# Altium PCB PCB1.PcbDoc
Units mm, origin at the board's own origin, x right, y up, seen from the top; angles counter-clockwise.
Board outline 46.99 x 49 mm, 2 copper layers (Top Layer, Bottom Layer), stack 0.578 mm thick; 50 components, 44 nets, 156 pads, 56 vias.
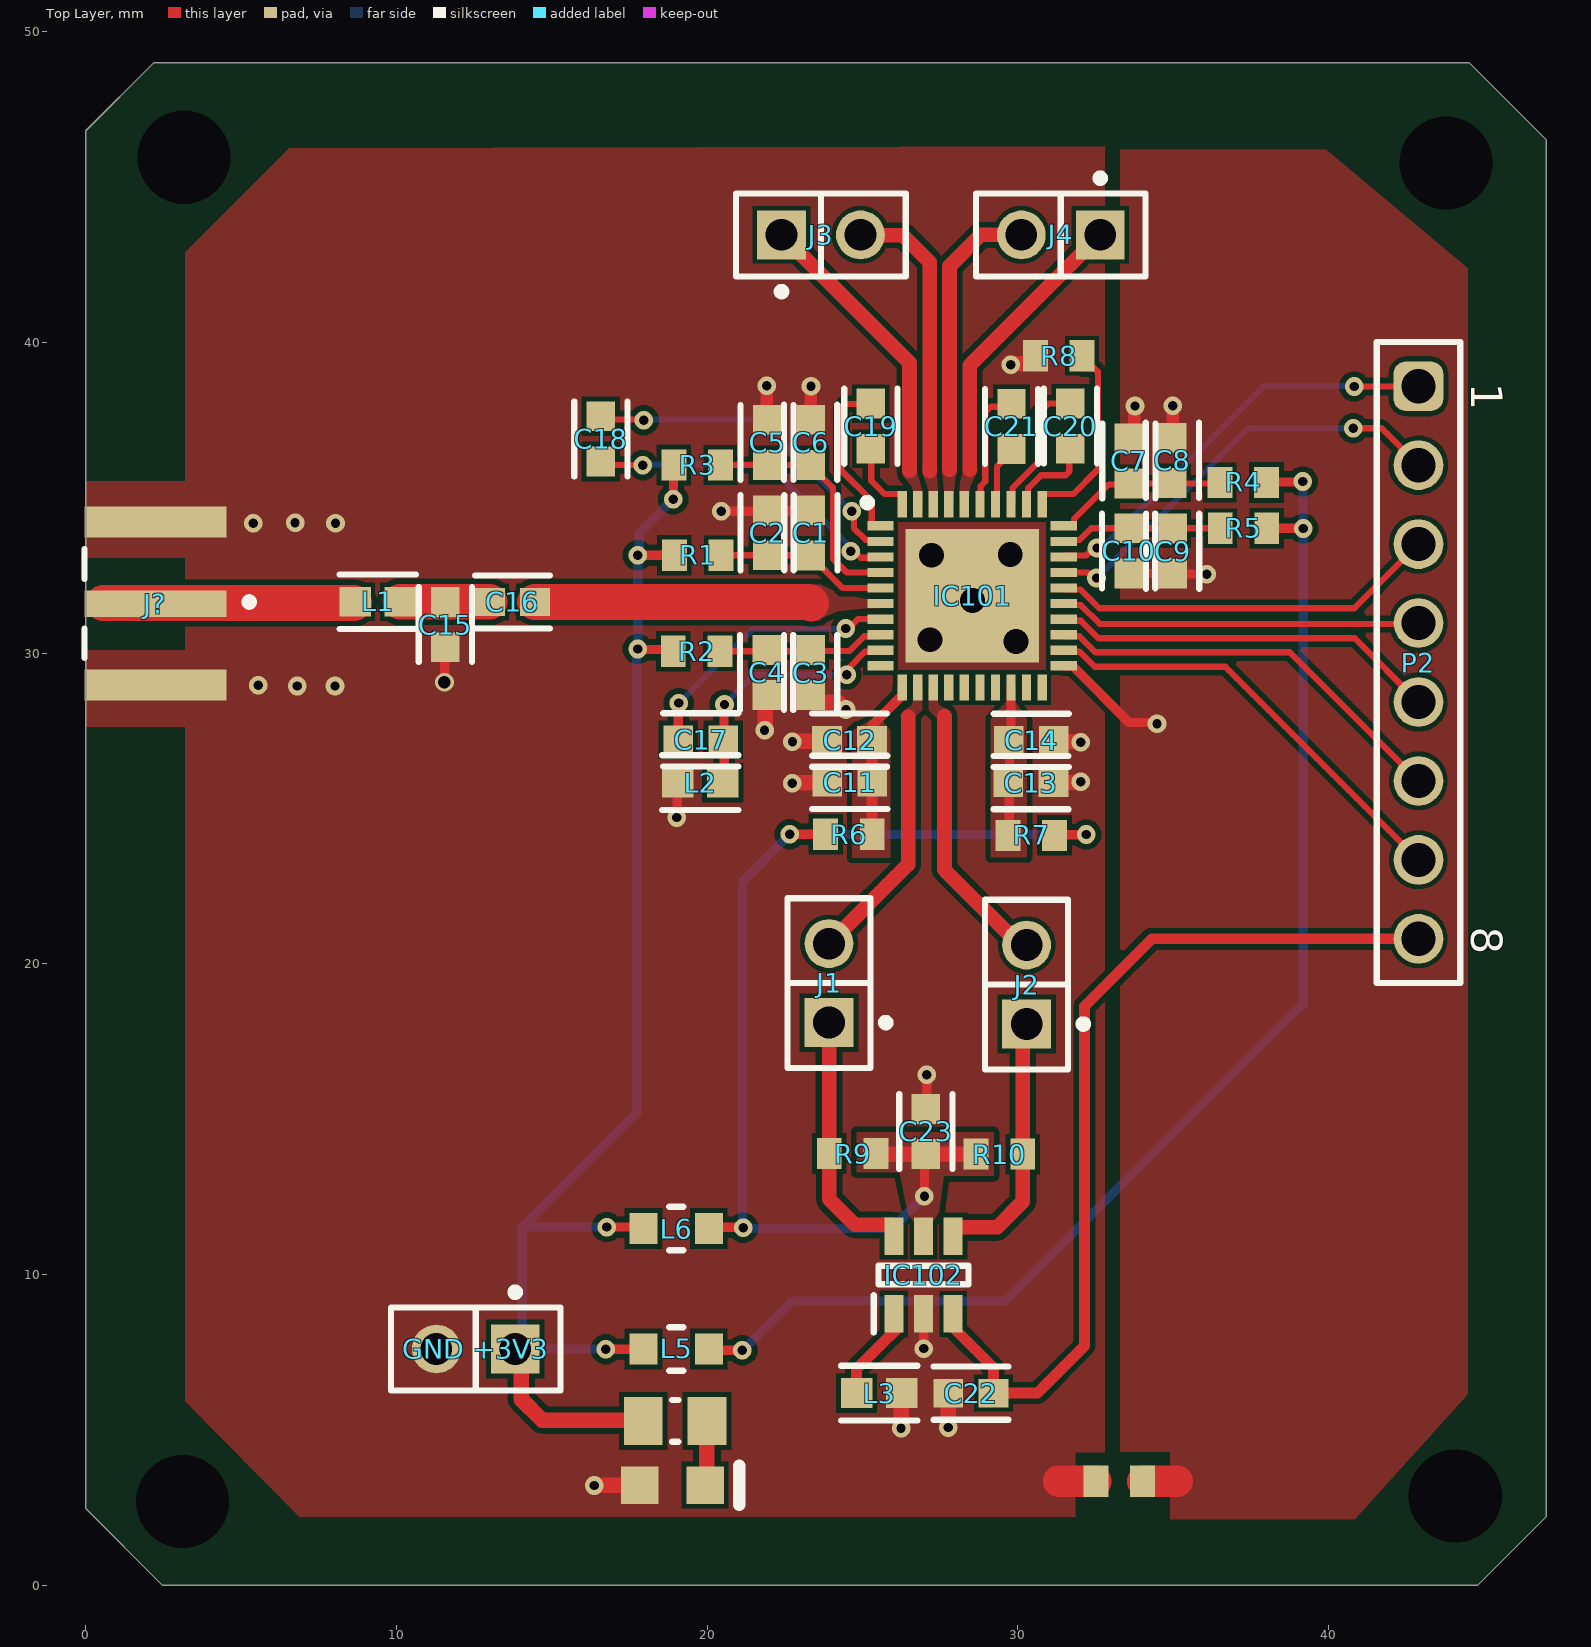
[diagram p0: Top Layer view]
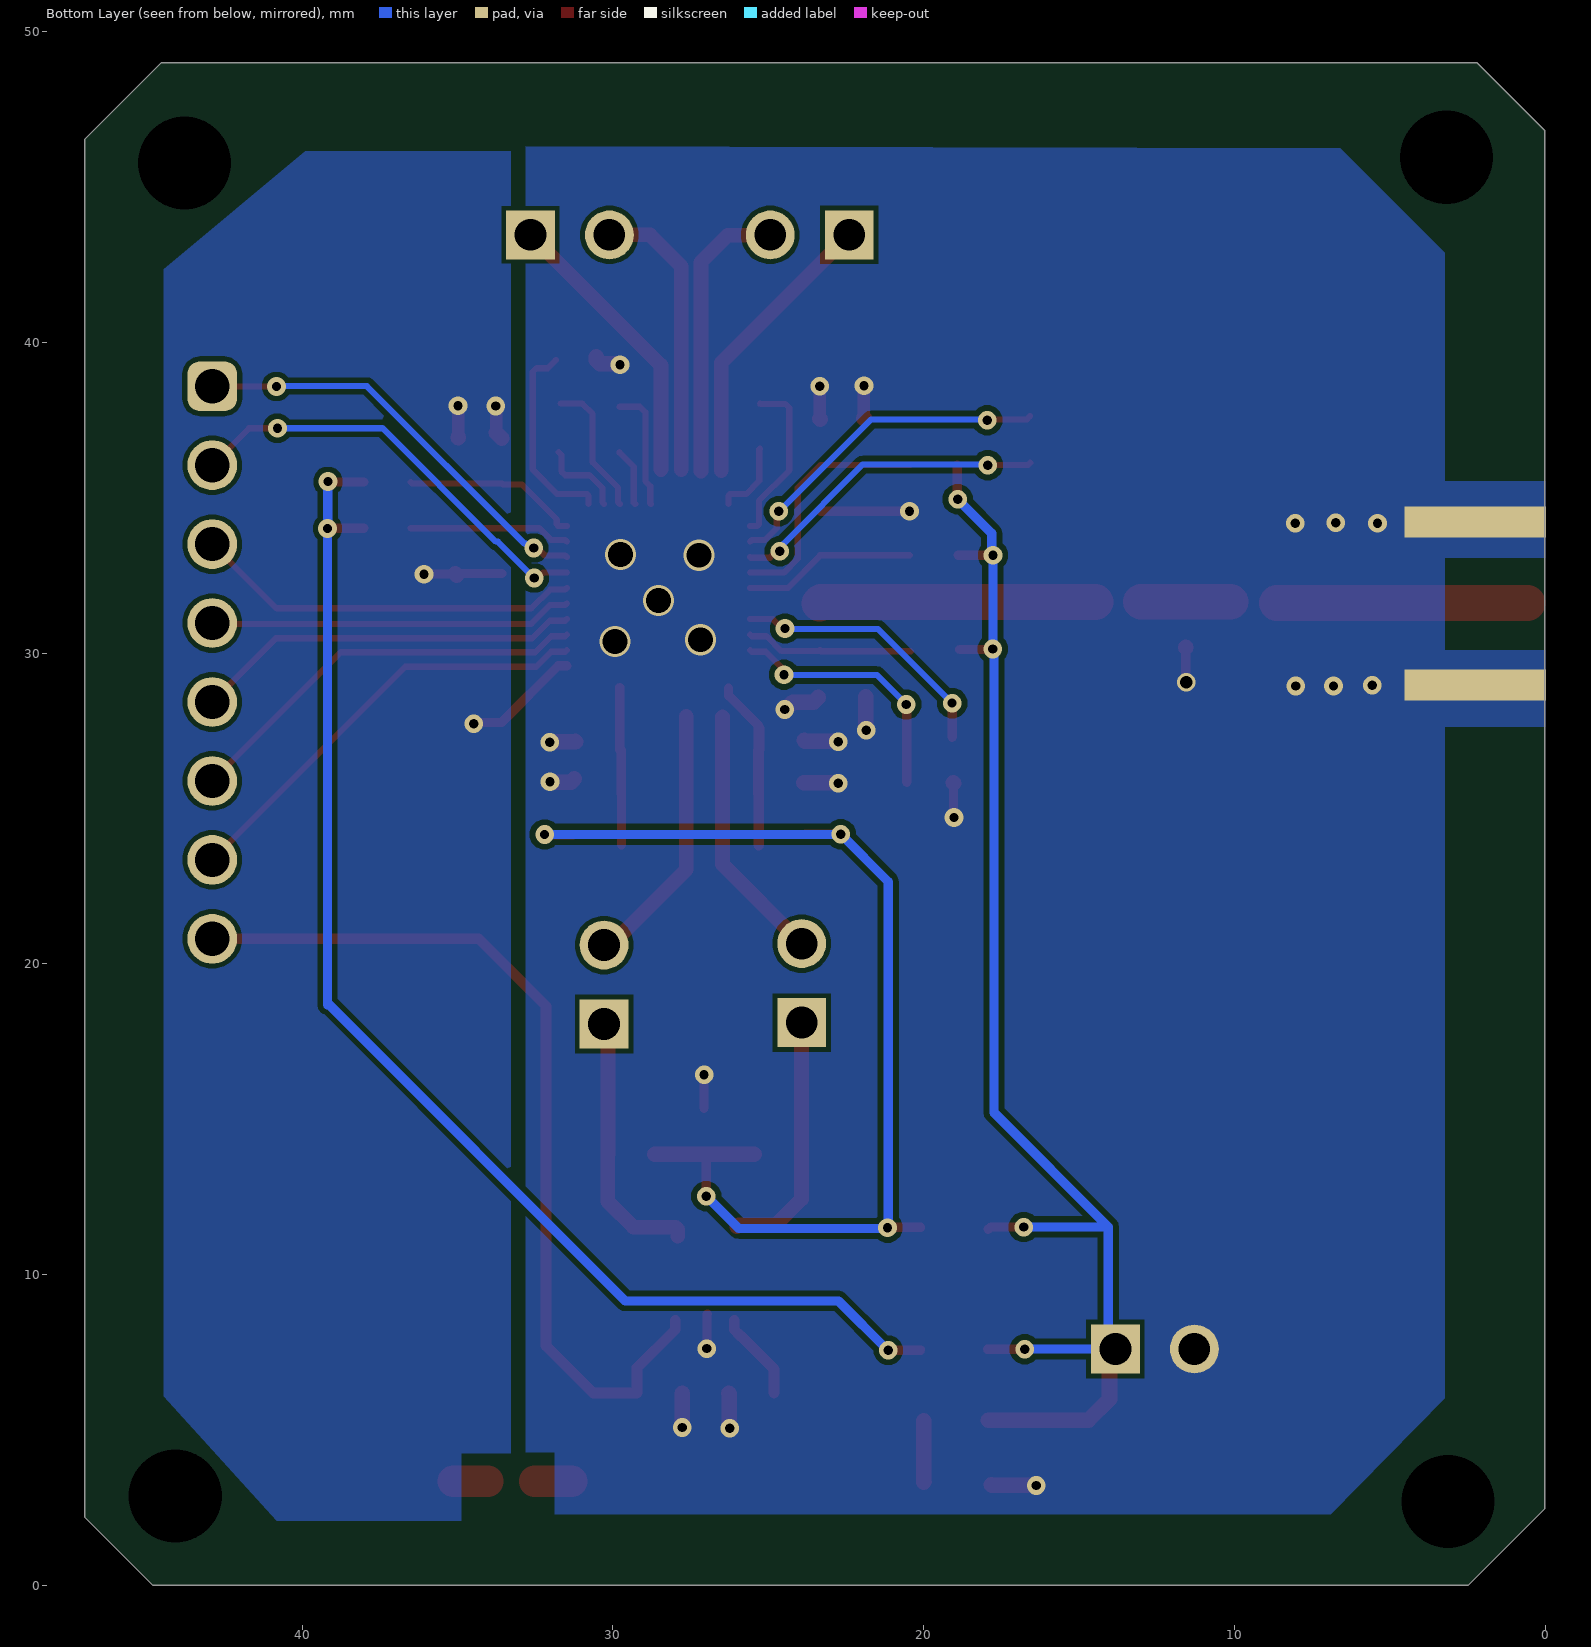
[diagram p1: Bottom Layer view, seen from below]
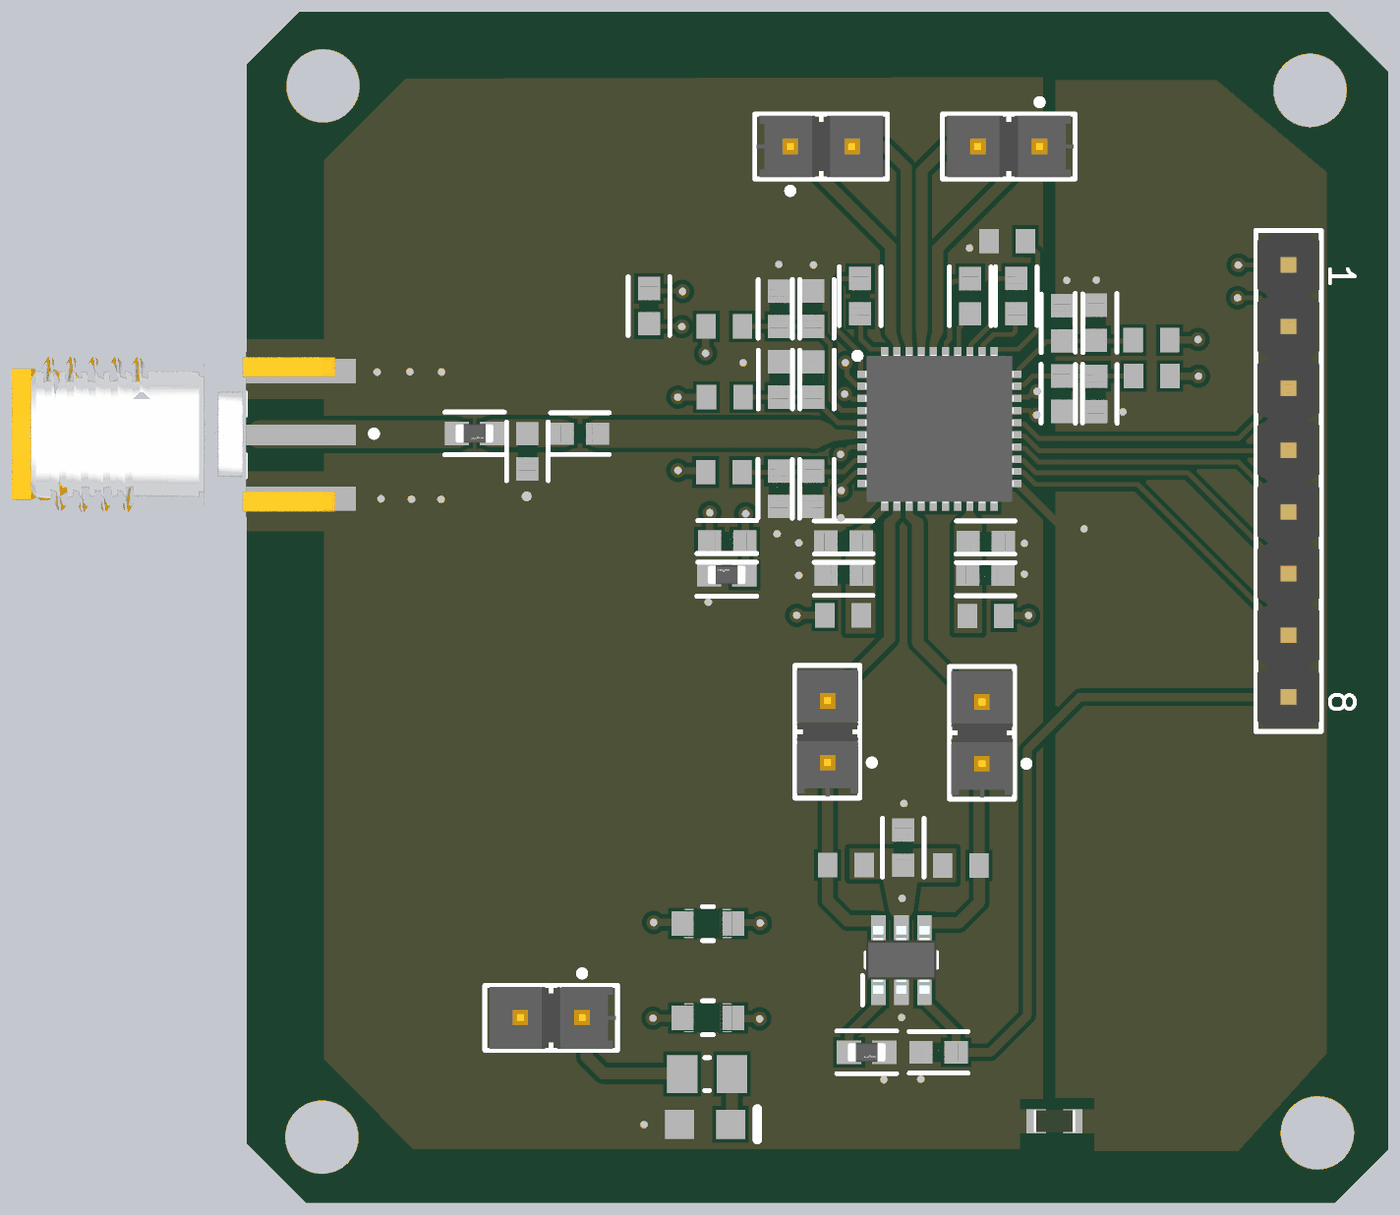
[diagram p2: 3D render of the assembled board from above, using the file's embedded part models]

## Layer stack, top to bottom
Board Layer Stack Top Solder: solder mask 0.0254, SM-001, Dk 4
Top Layer: signal copper 0.035
Dielectric 1: core 0.508, Core-043, Dk 3.38
Bottom Layer: signal copper 0.035
Board Layer Stack Bottom Solder: solder mask 0.0254, SM-001, Dk 4

## Board outline
0.009,2.471 0.009,46.806 2.203,49 44.523,49 47,46.523 47,2.202 44.798,0 2.48,0

## Design rules (kind name [scope] priority, off if disabled: settings)
Clearance [All] p1: gap=0.18 ignorepadtopadclearanceinfootprint=FALSE except(0.15: Arc-Arc Arc-Track Arc-SMDPad Arc-THPad Arc-Text Track-Track Track-SMDPad Track-THPad Track-Text SMDPad-SMDPad SMDPad-THPad SMDPad-Fill SMDPad-Poly SMDPad-Region SMDPad-Text THPad-THPad THPad-Fill THPad-Poly THPad-Region THPad-Text)
DiffPairsRouting DiffPairsRouting_1 [All] p1: maxlimit=0.149 minlimit=0.149 mostfreqgap=0.149 toplayer_minwidth=0.474 toplayer_maxwidth=0.474 toplayer_prefwidth=0.474 bottomlayer_minwidth=0.474 bottomlayer_maxwidth=0.474 bottomlayer_prefwidth=0.474 impedanceprofiledriven=TRUE impedanceprofileid={EFA40B8C-70B7-4446-A53F-03A1FA4931DC} impedanceprofilevalue=100.000000 maxuncoupledlength=12.7
HoleSize [All] p1: absolutevalues=TRUE maxlimit=3 minlimit=0.025 maxpercent=80.000 minpercent=20.000
MinimumSolderMaskSliver [All] p1: minsoldermaskwidth=0.12
PolygonConnect [All] p1: connectstyle=Direct reliefconductorwidth=0.254 reliefentries=4 polygonreliefangle="90 Angle" airgapwidth=0.254
RoutingVias [All] p1: holewidth=0.4 width=0.6 viastyle="Through Hole" minholewidth=0.3 minwidth=0.45 maxholewidth=0.4 maxwidth=0.6
SilkToSilkClearance [All] p1: silktosilkclearance=0.12
SilkToSolderMaskClearance [IsPad] p1: minsilkscreentomaskgap=0 clearancetoexposedcopper=TRUE
SolderMaskExpansion [All] p1: expansion=0.1 istentingtop=TRUE
Width [All] p1: maxlimit=10 minlimit=0.2 preferedwidth=0.2 minimp=50.000000 maximp=50.000000 favimp=50.000000
25 further rules are at their usual default settings.

## Classes and differential pairs
component class CMX994AQ4: C1 C2 C3 C4 C5 C6 C7 C8 C9 C10 C11 C12 C13 C14 C15 C16 C17 C18 C19 C20 C21 C22 C23 "GND +3V3" IC101 IC102 J1 J2 J3 J4 J? L1 L2 L3 L5 L6 P2 R1 R2 R3 R4 R5 R6 R7 R8 R9 R10
differential pair LO: +LO_P -LO_N
differential pair OUT: +OUT_P -OUT_N
differential pair RXQ: +RXQ_P -RXQ_N
differential pair RXI: +RXI_P -RXI_N

## Components (designator, comment, footprint, x,y, rotation, side; value= is the part's Value field where it differs from the comment)
C1 "CL10B392KB8NNND" FP-CL10-IPC_B#1 23.342,33.87 r90 top value=3.9nF
C2 "CL10B392KB8NNND" FP-CL10-IPC_B#1 21.935,33.871 r90 top value=3.9nF
C3 "CL10B392KB8NNND" FP-CL10-IPC_B#2 23.336,29.372 r270 top value=3.9nF
C4 "CL10B392KB8NNND" FP-CL10-IPC_B#1 21.922,29.376 r270 top value=3.9nF
C5 "CL10B392KB8NNND" FP-CL10-IPC_B#1 21.931,36.778 r90 top value=3.9nF
C6 "CL10B392KB8NNND" FP-CL10-IPC_B#1 23.337,36.783 r90 top value=3.9nF
C7 "CL10B392KB8NNND" FP-CL10-IPC_B#1 33.573,36.182 r90 top value=3.9nF
C8 "CL10B392KB8NNND" FP-CL10-IPC_B#1 34.976,36.204 r90 top value=3.9nF
C9 "CL10B392KB8NNND" FP-CL10-IPC_B#1 34.983,33.279 r270 top value=3.9nF
C10 "CL10B392KB8NNND" FP-CL10-IPC_B#1 33.567,33.289 r270 top value=3.9nF
C11 "CL10B392KB8NNND" FP-CL10-IPC_B#1 24.593,25.842 r180 top value=3.9nF
C12 "CL10B392KB8NNND" FP-CL10-IPC_B#1 24.586,27.201 r180 top value=3.9nF
C13 "CL10B392KB8NNND" FP-CL10-IPC_B#1 30.424,25.829 r0 top value=3.9nF
C14 "CL10B392KB8NNND" FP-CL10-IPC_B#1 30.434,27.194 r0 top value=3.9nF
C15 "CL10B392KB8NNND" FP-CL10-IPC_B#1 11.58,30.917 r270 top value=3.9nF
C16 "CL10B392KB8NNND" FP-CL10-IPC_B#1 13.741,31.645 r0 top value=3.9nF
C17 "CL10B392KB8NNND" FP-CL10-IPC_B#1 19.799,27.209 r0 top value=3.9nF
C18 "CL10B392KB8NNND" FP-CL10-IPC_B#1 16.582,36.891 r270 top value=3.9nF
C19 "CL10B392KB8NNND" FP-CL10-IPC_B#1 25.271,37.3 r90 top value=3.9nF
C20 "CL10B392KB8NNND" FP-CL10-IPC_B#1 31.691,37.303 r270 top value=3.9nF
C21 "CL10B392KB8NNND" FP-CL10-IPC_B#1 29.798,37.295 r270 top value=3.9nF
C22 "CL10B392KB8NNND" FP-CL10-IPC_B#1 28.493,6.188 r0 top value=3.9nF
C23 "CL10B392KB8NNND" FP-CL10-IPC_B#1 27.044,14.606 r90 top value=3.9nF
D? "HSMG-C170" AVAG-HSMX-C170_V 18.889,3.225 r0 top
"GND +3V3" "TSW-102-14-G-S" FP-TSW-102-14-G-S-MFG 12.56,7.607 r180 top (schematic designator J5)
IC101 "CMX994AQ4" QFN50P600X600X100-41N-D 28.533,31.843 r0 top
IC102 "MAX2606EUT+T" SOT95P280X145-6N 26.966,9.988 r90 top
J1 "TSW-102-14-G-S" FP-TSW-102-14-G-S-MFG 23.926,19.38 r90 top
J2 "TSW-102-14-G-S" FP-TSW-102-14-G-S-MFG 30.285,19.333 r90 top
J3 "TSW-102-14-G-S" FP-TSW-102-14-G-S-MFG 23.667,43.457 r0 top
J4 "TSW-102-14-G-S" FP-TSW-102-14-G-S-MFG 31.384,43.457 r180 top
J? "EMPCB.SMAFSTJ.B.HT" FP-EMPCB_SMAFSTJ_B_HT-MFG -4.777,31.593 r90 top
L1 "LQM18NNR22K00D" FP-LQM18NN_00-IPC_B 9.405,31.651 r0 top
L2 "LQM18NNR22K00D" FP-LQM18NN_00-IPC_B 19.782,25.833 r180 top
L3 "LQM18NNR22K00D" FP-LQM18NN_00-IPC_B 25.541,6.188 r0 top
L5 "7427920415" FP-7427920415-MFG#1 19.009,7.607 r0 top
L6 "7427920415" FP-7427920415-MFG#2 19.009,11.483 r0 top
P2 "61300811121" 61300811121 42.893,29.696 r270 top
R "Resistor 0R +/- 5% 0603 100 mW" RESC1608X55X25ML10T15#1 33.269,3.352 r0 top value=0
R1 "RC0603JR-073R3L" RESC1608X55X25ML10T15#1 19.7,33.147 r0 top value=3.3
R2 "RC0603JR-073R3L" RESC1608X55X25ML10T15#1 19.665,30.06 r0 top value=3.3
R3 "RC0603JR-073R3L" RESC1608X55X25ML10T15#1 19.682,36.056 r0 top value=3.3
R4 "RC0603JR-073R3L" RESC1608X55X25ML10T15#1 37.253,35.494 r180 top value=3.3
R5 "RC0603JR-073R3L" RESC1608X55X25ML10T15#1 37.264,34.016 r180 top value=3.3
R6 "RC0603JR-073R3L" RESC1608X55X25ML10T15#1 24.567,24.17 r0 top value=3.3
R7 "RC0603JR-073R3L" RESC1608X55X25ML10T15#1 30.435,24.137 r180 top value=3.3
R8 "RC0603JR-073R3L" RESC1608X55X25ML10T15#1 31.319,39.567 r0 top value=3.3
R9 "RC0603JR-073R3L" RESC1608X55X25ML10T15#2 24.682,13.896 r0 top value=3.3
R10 "RC0603JR-073R3L" RESC1608X55X25ML10T15#1 29.411,13.874 r0 top value=3.3
R? "CRCW080510R0FKEA" RESC2013X50X30ML20T20 18.973,5.294 r0 top locked value=10

## Footprints (in the part's own frame and the unit in brackets; to place one, negate y for a bottom-side part, rotate by r counter-clockwise, add the part's x,y. Pads: shape width x height; smd on the part's side, far side on the other; paste and mask are expansions set on the pad)
61300811121 [mm] "Pin Header, pitch 2.54 mm, THT, Vertical, single row, 8p"
  rrect50% 1.6x1.6 hole 1.1 mask+0: 1(-8.89,0)
  round 1.6 hole 1.1 mask+0: 2(-6.35,0) 3(-3.81,0) 4(-1.27,0) 5(1.27,0) 6(3.81,0) 7(6.35,0) 8(8.89,0)
  silkscreen extent -10.31,-1.34 10.31,1.35, body extent -10.16,-1.27 10.16,1.27, height 8.57
AVAG-HSMX-C170_V [mm] "SMD, 2-Leads, Body 2x1.25mm, Height 0.8mm"
  rect 1.2x1.2 smd mask+0: 1(-1.05,0) 2(1.05,0)
  silkscreen extent 2.15,-0.63 2.15,0.63, body extent -1,-0.63 1,0.63, height 0.8
FP-7427920415-MFG#1 [mm]
  rect 0.9x1 smd paste+0 mask+0: 1(-1.05,0) 2(1.05,0)
  silkscreen extent -0.22,-0.7 0.22,0.7, body extent -1.6,-0.8 1.6,0.8, height 0.25
FP-7427920415-MFG#2 [mm]
  rect 0.9x1 smd paste+0 mask+0: 1(-1.05,0)
  rect 0.9x1 smd mask+0: 2(1.05,0)
  silkscreen extent -0.22,-0.7 0.22,0.7, body extent -1.6,-0.8 1.6,0.8, height 0.25
FP-CL10-IPC_B#1 [mm]
  rect 0.958x0.912 smd paste+0 mask+0: 1(-0.727,0) 2(0.727,0)
  silkscreen extent -1.21,-0.86 1.21,0.86, body extent -1.46,-0.71 1.46,0.71, height 0.25
FP-CL10-IPC_B#2 [mm]
  rect 0.958x0.912 smd mask+0: 1(-0.727,0)
  rect 0.958x0.912 smd paste+0 mask+0: 2(0.727,0)
  silkscreen extent -1.21,-0.86 1.21,0.86, body extent -1.46,-0.71 1.46,0.71, height 0.25
FP-EMPCB_SMAFSTJ_B_HT-MFG [mm]
  rect 0.85x4.56 smd paste+0 mask+0: 1(0,-7.03)
  rect 1x4.56 smd paste+0 mask+0: 2(-2.62,-7.03) 3(2.62,-7.03)
  rect 1x4.56 smd far side paste+0 mask+0: 4(-2.62,-7.03) 5(2.62,-7.03)
  silkscreen extent -1.75,-10.17 1.75,-4.75, body extent -3.32,-9.41 3.32,5.35, height 0.25
FP-LQM18NN_00-IPC_B [mm]
  rect 1.007x0.958 smd paste+0 mask+0: 1(-0.726,0) 2(0.726,0)
  silkscreen extent -1.23,-0.88 1.23,0.88, body extent -1.48,-0.73 1.48,0.73, height 0.25
FP-TSW-102-14-G-S-MFG [mm]
  rect 1.57x1.57 hole 1.02 paste-1000 mask+0: 1(-1.27,0)
  round 1.57 hole 1.02 paste-1000 mask+0: 2(1.27,0)
  silkscreen extent -2.73,-1.95 2.73,1.34, body extent -2.83,-1.44 2.83,1.44, height 0.25
QFN50P600X600X100-41N-D [mm]
  rect 0.85x0.3 smd mask+0: 1(-2.95,2.25) 2(-2.95,1.75) 3(-2.95,1.25) 4(-2.95,0.75) 5(-2.95,0.25) 6(-2.95,-0.25) 7(-2.95,-0.75) 8(-2.95,-1.25) 9(-2.95,-1.75) 10(-2.95,-2.25) 21(2.95,-2.25) 22(2.95,-1.75) 23(2.95,-1.25) 24(2.95,-0.75) 25(2.95,-0.25) 26(2.95,0.25) 27(2.95,0.75) 28(2.95,1.25) 29(2.95,1.75) 30(2.95,2.25)
  rect 0.3x0.85 smd mask+0: 11(-2.25,-2.95) 12(-1.75,-2.95) 13(-1.25,-2.95) 14(-0.75,-2.95) 15(-0.25,-2.95) 16(0.25,-2.95) 17(0.75,-2.95) 18(1.25,-2.95) 19(1.75,-2.95) 20(2.25,-2.95) 31(2.25,2.95) 32(1.75,2.95) 33(1.25,2.95) 34(0.75,2.95) 35(0.25,2.95) 36(-0.25,2.95) 37(-0.75,2.95) 38(-1.25,2.95) 39(-1.75,2.95) 40(-2.25,2.95)
  rect 4.3x4.3 smd mask+0: 41(0,0)
  silkscreen extent -3.5,2.88 -3.25,3.12, body extent -3.05,-3.05 3.05,3.05, height 1
RESC1608X55X25ML10T15#1 [mm] "Chip Resistor, 2-Leads, Body 1.70x0.90mm, IPC Low Density"
  rect 0.8x1 smd mask+0: 1(-0.75,0) 2(0.75,0)
  body extent -0.85,-0.45 0.85,0.45, height 0.55
RESC1608X55X25ML10T15#2 [mm] "Chip Resistor, 2-Leads, Body 1.60x0.80mm, IPC Low Density"
  rect 0.8x1 smd paste+0 mask+0: 1(-0.75,0)
  rect 0.8x1 smd mask+0: 2(0.75,0)
  body extent -0.85,-0.45 0.85,0.45, height 0.55
RESC2013X50X30ML20T20 [mm] "Chip Resistor, 2-Leads, Body 2.00x1.25mm, IPC Low Density"
  rect 1.25x1.55 smd mask+0: 1(-1.025,0) 2(1.025,0)
  silkscreen extent -0.1,-0.67 0.1,0.67, body extent -1.1,-0.72 1.1,0.72, height 0.5
SOT95P280X145-6N [mm]
  rect 1.2x0.6 smd mask+0: 1(-1.25,0.95) 2(-1.25,0) 3(-1.25,-0.95) 4(1.25,-0.95) 5(1.25,0) 6(1.25,0.95)
  silkscreen extent -1.85,-1.45 0.3,1.6, body extent -1.4,-1.45 1.4,1.45, height 1.45

## Part data
C1 C2 C3 C4 C5 C6 C7 C8 C9 C10 C11 C12 C13 C14 C15 C16 C17 C18 C19 C20 C21 C22 C23: library part CMP-001-00084-1, "Ceramic Capacitor, Multilayer, Ceramic, 50V, 10% +Tol, 10% -Tol, X7R, 15% TC, 0.0039uF, Surface Mount, 0603", Capacitor Type=Ceramic, Case/Package=0603, Max Operating Temperature=125°C, Min Operating Temperature=-55°C, Mounting Technology="Surface Mount", Pins=2, RoHS Compliant=Yes
D?: library part CMP-007-00036-1, "Single Color LED, Green, Untinted Diffused, 1.4mm", Forward Current=20mA, Forward Voltage=2.6V, Max Operating Temperature=85°C, Min Operating Temperature=-40°C, Mounting Technology="Surface Mount", Pins=2, RoHS Compliant=Yes
"GND +3V3" J1 J2 J3 J4: library part CMP-002-00079-1, "Board Connector, 2 Contact(s), 1 Row(s), Male, Straight, 0.1 inch Pitch, Solder Terminal, Black Insulator, Receptacle", Connector Type="BOARD CONNECTOR", Mounting Technology=Board, RoHS Compliant=Yes
IC101: "Integrated Circuit", Manufacturer_Name="CML Microcircuits", Mouser Part Number=226-CMX994AQ4, Datasheet Link=https://www.mouser.in/datasheet/2/976/cml_referer_download-1660539.pdf, Height=1mm, Manufacturer_Part_Number=CMX994AQ4, Mouser Price/Stock=https://www.mouser.co.uk/ProductDetail/CML-Microcircuits/CMX994AQ4?qs=unwgFEO1A6syLBEO2tvR4g%3D%3D
IC102: "Integrated Circuit", Manufacturer_Name="Analog Devices", Mouser Part Number=700-MAX2606EUTT, Datasheet Link=https://www.mouser.co.uk/datasheet/2/256/MAX2605-MAX2609-1515582.pdf, Height=1.45mm, Manufacturer_Part_Number=MAX2606EUT+T, Mouser Price/Stock=https://www.mouser.co.uk/ProductDetail/Maxim-Integrated/MAX2606EUT%2bT?qs=GxOUx7aO6nxQrK5ySdDhWg%3D%3D
J?: library part CMP-002-00087-1, "SMA Connector Jack, Female Socket 50 Ohm Board Edge, End Launch Solder"
L1 L2 L3: library part CMP-006-00026-1, "General Purpose Inductor, 0.22uH, 10%, 1 Element, Ferrite-Core, SMD, 0603", Max Current Rating=50mA, Max Operating Temperature=85°C, Min Operating Temperature=-40°C, Self Resonant Frequency=150MHz, Tolerance=10%, Pins=2, RoHS Compliant=Yes
L5 L6: library part CMP-006-00027-1, "Ferrite Bead, 1 Function(s), 0.5A, 2 Pin(s)", Current Rating=500mA, Max Operating Temperature=125°C, Min Operating Temperature=-55°C, Mounting Technology="Surface Mount", RoHS Compliant=Yes
P2: library part CMP-002-00082-1, "Board Connector, 8 Contact(s), 1 Row(s), Male, Straight, 0.1 inch Pitch, Solder Terminal, Locking, Black Insulator, Plug", Max Operating Temperature=125°C, Min Operating Temperature=-40°C, Connector Type="BOARD CONNECTOR", Mounting Technology=Board, RoHS Compliant=Yes
R: library part CMP-009-00006-5, "Chip Resistor, 0 Ohm, 0.1 W, -55 to 155 degC, 0603 (1608 Metric)", Case/Package=0603, Max Operating Temperature=155°C, Min Operating Temperature=-55°C, Power=100mW, Tolerance=5%, Voltage Rating=50V, Mounting Technology=SM, Pins=2, RoHS Compliant=True
R1 R2 R3 R4 R5 R6 R7 R8 R9 R10: library part CMP-009-00186-1, "Fixed Resistor, Metal Glaze/thick Film, 0.1W, 3.3ohm, 75V, 5% +/-Tol, 200ppm/Cel, Surface Mount, 0603", Case/Package=0603, Max Operating Temperature=155°C, Min Operating Temperature=-55°C, Power=100mW, Tolerance=5%, Mounting Technology="Surface Mount", Pins=2, RoHS Compliant=Yes
R?: library part CMP-009-00182-1, "Fixed Resistor, Metal Glaze/thick Film, 0.125W, 10ohm, 150V, 1% +/-Tol, 100ppm/Cel, Surface Mount, 0805", Case/Package=0805, Max Operating Temperature=155°C, Min Operating Temperature=-55°C, Power=125mW, Tolerance=1%, Mounting Technology="Surface Mount", Pins=2, RoHS Compliant=Yes

## Free pads (board coordinates)
  round 1.524 hole 3 mask+0: 2(43.782,45.767) 2(44.081,2.874) 3(3.126,2.696) 4(3.174,45.952)

## Via types
v1: diameter 0.6, hole 0.3, Top Layer to Bottom Layer, tented both sides, 50 vias
v2: diameter 1, hole 0.8, Top Layer to Bottom Layer, tented both sides, 5 vias
v3: diameter 0.6, hole 0.4, Top Layer to Bottom Layer, tented both sides, 1 vias

## Nets (pads, with @x,y where several pads share a name; then routed paths per layer and width w, separated by ;. In a path a pad name is that pad's centre, name@x,y a point inside that pad or via, vN(x,y) a via of type N, cw(c..) or ccw(c..) an arc to the next point about the centre after c; other vN are vias at no path point)
+3V3A: "GND +3V3.1" L5.1 L6.1 R1.1 R2.1 R3.1 R?.1 | length 46.4
  Top Layer w0.2: 13.83,7.607 14.021,7.417 ; L5.1@17.947,7.595 L5.1
  Top Layer w0.3: v1(16.745,7.595) L5.1@17.947,7.595 ; v1(16.778,11.529) 17.844,11.529 L6.1@17.918,11.455 ; v1(17.77,33.145) R1.1@18.89,33.146 ; v1@17.792,30.113 R2.1@18.84,30.113 ; v1@18.921,34.959 R3.1@18.921,36.044
  Top Layer w0.5: 14.021,7.417 14.021,5.99 14.695,5.316 R?.1@17.926,5.316 ; v1(17.77,33.145) v1(17.77,33.145) ; v1(17.773,30.132) v1@17.792,30.113 ; v1(18.909,34.947) v1@18.921,34.959
  Bottom Layer w0.2: 13.83,7.607 13.835,7.603 ; v1(16.745,7.595) v1@16.757,7.607 ; v1@17.771,30.133 v1(17.773,30.132) ; v1@17.771,33.144 v1(17.77,33.145) v1@17.815,33.189
  Bottom Layer w0.3: 14.058,7.621 14.058,11.534 ; 14.071,7.607 v1@16.757,7.607 ; v1(16.778,11.529) 16.773,11.534 14.058,11.534 ; v1@17.771,30.133 v1@17.771,33.144 ; v1(17.773,30.132) 17.737,30.097 17.737,15.213 14.058,11.534 ; v1@17.815,33.189 17.815,33.853 v1(18.909,34.947)
  Bottom Layer w0.5: 14.058,7.621 14.071,7.607
+3V3VCO: C23.1 IC102.5 L6.2 R6.1 R7.1 R9.2 R10.1 | length 36.9
  Top Layer w0.2: L6.2 L6.2@20.102,11.526 ; R9.2 R9.2@25.45,13.879 ; C23.1@26.996,13.831 C23.1 C23.1@27.049,13.874 ; R10.1@28.639,13.896 R10.1
  Top Layer w0.3: L6.2@20.102,11.526 v1@21.142,11.526 ; v1@22.666,24.169 R6.1@23.801,24.169 ; v1(26.996,12.522) C23.1@26.996,13.831 ; R7.1@31.278,24.149 v1@32.187,24.149
  Top Layer w0.5: v1(22.664,24.167) v1@22.666,24.169 ; R9.2@25.45,13.879 C23.1 ; C23.1@27.049,13.874 R10.1 ; v1@32.187,24.149 v1(32.199,24.162)
  Bottom Layer w0.2: v1(22.664,24.167) v1@22.674,24.157
  Bottom Layer w0.3: v1(22.664,24.167) 21.142,22.645 21.142,11.526 21.185,11.484 25.953,11.484 v1@26.991,12.522 ; v1@22.681,24.164 v1@32.197,24.164
  Bottom Layer w0.5: v1@22.674,24.157 v1@22.681,24.164 ; v1@32.197,24.164 v1(32.199,24.162)
  other v1: 21.163,11.505
AGND: "GND +3V3.2" C1.2 C2.2 C3.2 C4.2 C5.2 C6.2 C11.2 C12.2 C13.2 C14.2 C15.2 C22.1 C23.2 D?.1 IC101.41 IC102.2 J?.2 J?.3 J?.4 J?.5 L2.2 L3.2 R8.1 R.1 | length 22.2
  Top Layer w0.2: C15.2@11.572,30.182 C15.2 ; D?.1@17.824,3.241 D?.1 ; L2.2@19.047,25.824 L2.2 ; C4.2@21.862,28.589 C4.2 ; C5.2 C5.2@21.948,37.523 ; C1.2@23.307,34.561 C1.2 ; C6.2@23.323,37.524 C6.2 ; C3.2 C3.2@23.395,28.585 ; C12.2@23.846,27.188 C12.2 ; C11.2@23.853,25.829 C11.2 ; L3.2 L3.2@26.27,6.184 ; IC102.2@26.958,8.73 IC102.2 ; C23.2 C23.2@27.067,15.355 ; C22.1 C22.1@27.77,6.184 ; R8.1@30.531,39.529 R8.1 ; C14.2 C14.2@31.203,27.152
  Top Layer w0.3: v3@11.566,29.076 C15.2@11.566,30.176 ; v1@19.04,24.724 L2.2@19.04,25.816 ; v1(20.458,34.561) C1.2@23.307,34.561 ; IC102.2@26.958,8.73 26.972,8.716 26.972,7.625 v1(26.977,7.62) ; C23.2@27.067,15.355 v1(27.067,16.429)
  Top Layer w0.4: C5.2@21.927,37.563 v1@21.927,38.601 ; C6.2@23.342,37.547 v1@23.342,38.578
  Top Layer w0.5: 11.15,7.468 11.29,7.607 ; v3(11.551,29.062) v3@11.566,29.076 ; C15.2@11.566,30.176 C15.2@11.572,30.182 ; v1(16.377,3.213) 16.383,3.219 17.803,3.219 D?.1@17.824,3.241 ; v1(19.023,24.707) v1@19.04,24.724 ; L2.2@19.04,25.816 L2.2@19.047,25.824 ; v1(21.853,27.522) 21.872,27.541 21.872,28.58 C4.2@21.862,28.589 ; C5.2@21.9,37.536 C5.2@21.927,37.563 ; v1(21.923,38.604) v1@21.927,38.601 ; v1(22.747,25.81) 22.763,25.826 23.85,25.826 C11.2@23.853,25.829 ; v1(22.749,27.148) 22.768,27.167 23.824,27.167 C12.2@23.846,27.188 ; C6.2@23.323,37.524 23.344,37.545 C6.2@23.342,37.547 ; v1@23.342,38.578 v1(23.347,38.582) ; C3.2@23.395,28.585 23.395,28.562 23.542,28.416 24.214,28.416 24.447,28.183 v1(24.474,28.183) ; v1(26.245,5.059) 26.256,5.07 26.256,6.17 L3.2@26.27,6.184 ; v1(27.766,5.08) 27.766,6.181 C22.1@27.77,6.184 ; v1(29.77,39.28) 29.797,39.28 29.834,39.317 30.419,39.317 30.531,39.429 R8.1@30.531,39.529 ; C14.2@31.203,27.152 31.209,27.158 31.215,27.152 32.009,27.152 v1(32.028,27.133) ; C13.2@31.24,25.953 31.349,25.844 32.01,25.844 v1(32.025,25.859)
  Top Layer w1: 31.311,3.352 R.1
  other v1: 6.811,28.941 8.028,28.941 5.561,28.962 5.398,34.177 6.745,34.19 8.047,34.179
  other v2: 29.939,30.368 27.178,30.428 28.538,31.688 27.229,33.148 29.757,33.168
CDATA: IC101.27 P2.2 | length 14
  Top Layer w0.2: IC101.27 32.246,32.593 32.425,32.414 v1(32.533,32.414) ; v1(40.795,37.233) 41.706,37.233 P2.2
  Bottom Layer w0.2: v1(32.533,32.414) 33.707,33.588 33.767,33.588 37.412,37.233 v1(40.795,37.233)
CSN: IC101.24 P2.5 | length 12.5
  Top Layer w0.2: IC101.24 31.533,31.043 32.031,31.043 32.597,30.477 40.842,30.477 P2.5
DGND: C7.2 C8.2 C9.2 C10.2 IC101.21 R.2 | length 9.6
  Top Layer w0.2: C10.2@33.556,32.551 C10.2 ; C9.2@34.974,32.562 C9.2
  Top Layer w0.3: IC101.21 31.758,29.593 33.582,27.769 34.441,27.769 v1(34.482,27.728) ; C10.2 C9.2@34.974,32.562 ; C9.2@35.066,32.546 v1@36.073,32.546
  Top Layer w0.4: C7.2@33.752,37.088 v1@33.752,37.931 ; C8.2@34.983,36.938 v1(34.983,37.961)
  Top Layer w0.5: C7.2 C7.2@33.752,37.088 ; v1@33.752,37.931 v1(33.771,37.951) ; C8.2 C8.2@34.983,36.938 ; C9.2@35.03,32.51 C9.2@35.066,32.546 ; v1@36.073,32.546 v1(36.079,32.539)
  Top Layer w1: R.2 35.14,3.352
DVDD: C9.1 C10.1 IC101.29 R5.2 | length 5.2
  Top Layer w0.2: IC101.29 31.533,33.643 31.99,33.643 32.363,34.016 33.567,34.016 34.983,34.016 R5.2
LO_N: IC101.13 J2.2 | length 8.6
  Top Layer w0.474: 27.641,27.965 27.641,23.033 30.071,20.603 J2.2
LO_P: IC101.12 J1.2 | length 8.4
  Top Layer w0.474: J1.2 26.475,23.199 26.475,27.945
NetC15_1: C15.1 C16.1 L1.2 | length 2.9
  Top Layer w0.2: C16.1@13.008,31.651 C16.1
  Top Layer w1.153: L1.2 C16.1@13.008,31.651
NetC16_2: C16.2 IC101.6 | length 8.9
  Top Layer w1.153: C16.2 23.305,31.645 23.357,31.592
NetC17_1: C17.1 IC101.7 | length 8.7
  Top Layer w0.2: v1(24.463,30.789) 24.555,30.789 24.858,31.093 IC101.7
  Top Layer w0.3: C17.1@19.079,27.296 v1@19.079,28.384
  Top Layer w0.35: v1@19.079,28.384 v1(19.086,28.391)
  Bottom Layer w0.2: v1(19.086,28.391) 21.466,30.77 24.443,30.77 v1(24.463,30.789)
NetC17_2: C17.2 IC101.9 L2.1 | length 8.3
  Top Layer w0.2: L2.1 L2.1@20.517,25.842 ; v1(24.494,29.305) 24.571,29.382 24.571,29.532 25.081,30.043 25.533,30.043 IC101.9
  Top Layer w0.3: C17.2@20.545,27.283 v1@20.545,28.328 ; L2.1@20.55,25.848 C17.2@20.55,27.25
  Top Layer w0.35: v1@20.545,28.328 v1(20.563,28.347)
  Bottom Layer w0.2: v1(20.563,28.347) 21.513,29.297 v1@24.486,29.297
NetC18_1: C18.1 IC101.2 | length 11
  Top Layer w0.2: C18.1 16.685,37.515 17.938,37.515 v1(17.959,37.494) ; v1(24.661,34.564) 24.728,34.497 24.728,34.019 25.104,33.643 25.533,33.643 IC101.2
  Bottom Layer w0.2: v1(17.959,37.494) 17.981,37.515 21.7,37.515 v1@24.651,34.564
NetC18_2: C18.2 IC101.3 | length 10.4
  Top Layer w0.2: C18.2@16.574,36.125 16.65,36.049 v1(17.934,36.049) ; v1(24.63,33.276) 24.739,33.276 24.95,33.065 25.555,33.065 IC101.3
  Bottom Layer w0.2: v1(17.934,36.049) 17.954,36.069 21.963,36.069 24.524,33.509 24.524,33.491 24.63,33.385 v1(24.63,33.276)
NetC19_1: C19.1 IC101.40 | length 2.5
  Top Layer w0.2: C19.1 25.288,36.555 25.288,35.545 25.715,35.118 26.233,35.118 26.283,35.068 IC101.40
NetC19_2: C19.2 IC101.1 | length 5.5
  Top Layer w0.2: C19.2 25.255,38.011 24.445,38.011 24.328,37.894 24.328,35.871 25.302,34.897 25.302,34.143 25.352,34.093 IC101.1
NetC20_1: C20.1 IC101.33 | length 4.4
  Top Layer w0.2: IC101.33 29.833,34.843 29.833,35.314 30.655,36.136 30.655,37.7 30.986,38.03 C20.1
NetC20_2: C20.2 IC101.32 | length 2.7
  Top Layer w0.2: IC101.32 30.333,34.843 30.333,35.305 30.751,35.723 31.537,35.723 31.654,35.84 31.654,36.373 C20.2@31.741,36.46
NetC21_1: C21.1 IC101.35 | length 3.9
  Top Layer w0.2: IC101.35 28.802,34.812 28.802,35.373 28.954,35.525 28.954,37.746 29.133,37.925 C21.1@29.786,37.925
NetC21_2: C21.2 IC101.34 | length 1.9
  Top Layer w0.2: IC101.34 29.329,34.839 29.329,35.991 29.786,36.448 C21.2@29.786,36.471
NetD?_2: D?.2 R?.2 | length 2.1
  Top Layer w0.2: D?.2@19.833,3.331 D?.2
  Top Layer w0.5: D?.2@19.998,3.324 R?.2
NetIC101_31: IC101.31 R8.2 | length 6.5
  Top Layer w0.2: IC101.31 30.783,35.068 30.833,35.118 31.789,35.118 32.578,35.907 32.578,39.05 32.461,39.167 32.098,39.167 R8.2@31.836,39.429
NetIC102_1: IC102.1 L3.1 | length 2.9
  Top Layer w0.2: 25.876,8.027 25.894,8.027
  Top Layer w0.35: L3.1 24.815,6.967 25.876,8.027 ; 25.894,8.027 26.094,8.227 IC102.1@26.094,8.527
NetJ?_1: J?.1 L1.1 | length 8.1
  Top Layer w1.153: J?.1@0.571,31.611 L1.1@8.639,31.611
NetL5_2: L5.2 R4.1 R5.1 | length 43
  Top Layer w0.2: L5.2 L5.2@20.1,7.567
  Top Layer w0.3: L5.2@20.1,7.567 v1@21.153,7.567 ; R4.1@38.016,35.506 v1@39.158,35.506 ; R5.1@38.017,34.012 v1@39.182,34.012
  Top Layer w0.5: v1@39.158,35.506 v1(39.171,35.519) ; v1@39.182,34.012 v1(39.185,34.009)
  Bottom Layer w0.2: v1(39.171,35.519) v1@39.178,35.512 ; v1@39.178,34.016 v1(39.185,34.009) ; 39.185,18.687 39.205,18.667
  Bottom Layer w0.3: v1@21.153,7.567 22.739,9.153 29.601,9.153 39.185,18.737 ; v1@39.178,34.016 v1@39.178,35.512 ; 39.185,18.687 v1(39.185,34.009)
  other v1: 21.138,7.564
OUT_N: IC102.4 J2.1 R10.2 | length 8.6
  Top Layer w0.474: IC102.4 27.916,11.459 27.979,11.522 29.334,11.522 30.164,12.351 R10.2@30.164,13.871 ; R10.2 30.161,17.939 J2.1
OUT_P: IC102.6 J1.1 R9.1 | length 8.1
  Top Layer w0.474: J1.1 23.932,18.104 R9.1 ; R9.1@23.933,13.896 23.933,12.422 24.755,11.6 25.954,11.6 IC102.6@26.016,11.538
RDATA: IC101.25 P2.4 | length 11.7
  Top Layer w0.2: IC101.25 31.533,31.543 32.026,31.543 32.631,30.938 42.865,30.938 P2.4
RESETN: IC101.28 P2.1 | length 13.7
  Top Layer w0.2: IC101.28 31.533,33.143 32.202,33.143 32.44,33.381 v1(32.548,33.381) ; v1(40.826,38.58) 42.887,38.58 P2.1
  Bottom Layer w0.2: v1(32.548,33.381) 32.656,33.381 32.802,33.526 32.851,33.526 37.917,38.593 v1@40.813,38.593
RXEN: IC101.23 P2.6 | length 13.4
  Top Layer w0.2: IC101.23 31.533,30.543 31.983,30.543 32.499,30.027 38.753,30.027 P2.6
RXI_N: IC101.39 J3.1 | length 9.3
  Top Layer w0.474: J3.1 26.515,39.339 26.515,35.871
RXI_P: IC101.38 J3.2 | length 9.3
  Top Layer w0.474: J3.2 24.949,43.445 26.303,43.445 27.168,42.579 27.168,35.857
RXQ_N: IC101.37 J4.2 | length 9.3
  Top Layer w0.474: 27.802,35.898 27.802,42.449 28.81,43.457 J4.2
RXQ_P: IC101.36 J4.1 | length 9.3
  Top Layer w0.474: 28.455,35.907 28.455,39.258 J4.1
SCLK: IC101.26 P2.3 | length 12.5
  Top Layer w0.2: IC101.26 31.533,32.043 32.021,32.043 32.621,31.443 40.83,31.443 P2.3
TUNE: C22.2 IC102.3 P2.8 | length 29
  Top Layer w0.35: IC102.3@27.994,8.527 27.994,8.227 29.22,7.001 C22.2 30.634,6.187 32.148,7.702 32.148,18.636 34.318,20.806 P2.8
TXEN: IC101.22 P2.7 | length 14.2
  Top Layer w0.2: IC101.22 31.533,30.043 31.988,30.043 32.474,29.557 36.683,29.557 P2.7
VCCLNA: C1.1 C2.1 IC101.5 R1.2 | length 5.6
  Top Layer w0.2: R1.2 21.935,33.147 23.338,33.147 23.338,33.124 24.369,32.093 IC101.5
VCCLO: C11.1 C12.1 IC101.11 R6.2 | length 5.9
  Top Layer w0.2: C12.1@25.308,27.207 C12.1@25.316,27.199 ; C11.1@25.316,25.838 C11.1 ; IC101.11@26.233,28.843 IC101.11
  Top Layer w0.3: C12.1 25.313,27.671 26.26,28.618 26.283,28.618 IC101.11@26.283,28.872
  Top Layer w0.35: C12.1@25.302,26.887 25.302,27.207 C12.1@25.302,27.577 ; R6.2@25.306,23.83 C11.1@25.306,25.475 ; C11.1@25.31,25.479 25.31,25.838 C12.1@25.31,26.879
VCCRF: C3.1 C4.1 IC101.8 R2.2 | length 5.4
  Top Layer w0.2: R2.2 21.922,30.06 23.296,30.06 C3.1 23.369,30.065 24.579,30.065 25.057,30.543 25.533,30.543 IC101.8
VCCRXIF: C5.1 C6.1 IC101.4 R3.2 | length 7.9
  Top Layer w0.2: R3.2 21.931,36.056 23.314,36.056 24.05,35.32 24.05,33.036 24.494,32.593 IC101.4
VCCSYNTH: C13.1 C14.1 IC101.18 R7.2 | length 5.1
  Top Layer w0.2: R7.2 R7.2@29.688,24.14 ; C13.1 C13.1@29.702,25.833
  Top Layer w0.3: R7.2@29.726,23.834 29.726,24.137 C13.1@29.726,25.459 ; C13.1@29.731,25.464 29.731,25.808 C14.1@29.731,26.881 ; C14.1@29.783,26.881 IC101.18
VDDIO: C7.1 C8.1 IC101.30 R4.2 | length 5.7
  Top Layer w0.2: IC101.30 31.758,34.093 31.808,34.143 31.808,34.302 32.934,35.428 33.546,35.428 C7.1 34.976,35.455 36.464,35.455 R4.2
pads on no net: IC101.10 IC101.14 IC101.15 IC101.16 IC101.17 IC101.19 IC101.20

## Polygon pours and split planes (outlines as drawn)
AGND on Top Layer "NONET_L-01_P-001" (solid, pour order 92): 32.798,46.316 32.798,4.277 31.853,4.277 31.853,2.202 6.873,2.202 3.203,5.925 3.203,42.893 6.561,46.25
DGND on Top Layer "DGND_L01_P104" (solid, pour order 104): 39.932,46.192 44.471,46.192 33.296,46.192 33.296,4.298 34.903,4.298 34.903,2.13 40.836,2.13 44.475,6.156 44.475,2.213 44.475,42.391
NetC16_2 on Top Layer "NONET_L-01_P-001" (solid, remove dead copper, pour order 84): 23.688,31.065 23.543,31.059 24.201,31.34 25.161,31.45 25.56,31.447 25.56,31.599 24.937,32.222 25.56,31.599 25.56,31.738 25.074,31.742 24.201,31.867 25.161,31.73 24.338,31.886 23.688,32.187 24.748,31.886 23.62,32.207 23.706,32.201 23.399,32.222 23.399,31.065 23.393,31.059
AGND on Top Layer "NONET_L-01_P-001" (solid, pour order 103): 0.039,33.06 0.009,34.319 0.017,35.536 4.346,35.536 4.346,32.917 4.203,33.06
AGND on Top Layer "NONET_L-01_P-001" (solid, pour order 95): 0,27.623 0,28.808 0,29.493 0,30.098 0.039,30.086 0.051,30.098 4.38,30.098 4.38,27.479 4.236,27.623 0.039,27.623
RXQ_P on Top Layer "RXQ_P_L01_P068" (solid, pour order 68): 28.532,35.525 28.687,35.803 28.702,35.882 28.705,35.936 28.23,35.936 28.228,35.938 28.23,35.827 28.129,35.403 28.129,35.745 28.132,35.065 28.427,35.065 28.431,35.069 28.431,35.248
RXI_N on Top Layer "RXI_N_L01_P062" (solid, pour order 62): 26.93,34.795 26.783,34.793 26.639,34.795 26.639,35.226 26.28,35.296 26.639,35.226 26.606,35.339 26.3,35.714 26.288,35.859 26.28,35.965 26.718,35.965 26.755,35.965 26.743,35.859 26.93,35.206 26.93,35.753 26.93,34.935
+3V3VCO on Top Layer "+3V3VCO_L01_P009" (solid, pour order 9): 24.819,14.581 29.229,14.581 29.223,14.575 29.223,13.178 27.629,13.178 27.622,13.17 27.465,11.983 26.966,11.238 26.464,11.983 26.199,13.301 24.819,13.301
VCCLO on Top Layer "NONET_L-01_P-001" (solid, pour order 76): 24.673,27.5 25.548,28.011 25.449,28.078 25.2,28.067 25.211,28.078 25.449,28.078 25.901,27.5 25.901,27.625 25.901,23.422 24.937,23.422 24.629,23.422 24.673,23.336 24.673,27.661
VCCSYNTH on Top Layer "NONET_L-01_P-001" (solid, pour order 75): 29.691,28.483 29.882,28.483 29.884,28.485 30.291,27.882 30.291,28.078 30.291,23.428 30.287,23.432 29.131,23.432 29.131,27.951 29.131,27.882 29.663,28.482
RXI_P on Top Layer "RXI_P_L01_P065" (solid, pour order 65): 26.947,35.75 26.945,35.849 26.947,35.968 27.411,35.968 27.429,35.95 27.394,35.768 27.429,35.223 27.429,34.936 27.141,34.936 27.134,34.943 27.134,35.218
RXQ_N on Top Layer "RXQ_N_L01_P066" (solid, pour order 66): 27.64,34.798 27.632,35.208 27.565,35.863 27.568,35.952 28.035,35.952 28.037,35.951 28.035,35.853 27.99,35.604 27.783,35.697 27.99,35.604 27.934,35.208 27.931,34.798 27.783,34.793
LO_N on Top Layer "LO_N_L01_P061" (solid, pour order 61): 27.876,28.019 27.873,27.892 27.406,27.892 27.404,27.89 27.134,28.161 27.134,28.905 27.431,28.905 27.431,28.479 27.431,28.471 27.473,28.421 27.431,28.471 27.456,28.414 27.431,28.471 27.478,28.362 27.431,28.471 27.463,28.324 27.469,28.337 27.463,28.325 27.487,28.324 27.463,28.325 27.716,28.201 27.81,28.138
LO_P on Top Layer "LO_P_L01_P060" (solid, pour order 60): 26.585,28.32 26.332,28.143 26.252,28.048 26.241,27.963 26.712,27.963 26.826,28.079 26.932,28.183 26.932,28.193 26.932,28.886 26.634,28.886 26.634,28.471
AGND on Bottom Layer "NONET_L-01_P-001" (solid, pour order 98): 32.808,46.316 32.808,4.282 31.876,4.272 31.876,2.291 6.906,2.291 3.227,6.023 3.227,42.889 6.588,46.25
DGND on Bottom Layer "DGND_L02_P048" (solid, pour order 48): 39.904,46.148 44.447,46.148 33.282,46.148 33.282,4.968 33.282,4.254 33.996,4.254 34.879,4.254 34.879,2.086 40.814,2.086 44.451,6.081 44.451,42.344
AGND on Bottom Layer "NONET_L-01_P-001" (solid, pour order 106): 0.005,35.524 0.017,35.536 4.346,35.536 4.346,32.917 4.203,33.06 0.005,33.06
AGND on Bottom Layer "NONET_L-01_P-001" (solid, pour order 105): 0,27.623 0,28.486 0,30.098 0.039,30.086 0.051,30.098 4.38,30.098 4.38,27.479 4.236,27.623 0.039,27.623

## Text inside footprints (layer, text, board x,y; h text height)
P2: Top Overlay "1" at 44.593,38.706 h1.02 r270; Top Overlay "8" at 44.593,21.186 h1.02 r270